# Altium PCB PCB.PcbDoc
Units mm, origin at the board's own origin, x right, y up, seen from the top; angles counter-clockwise.
Board outline 53.47 x 68.83 mm, 2 copper layers (Top Layer, Bottom Layer), stack 1.571 mm thick; 88 components, 55 nets, 289 pads, 36 vias.
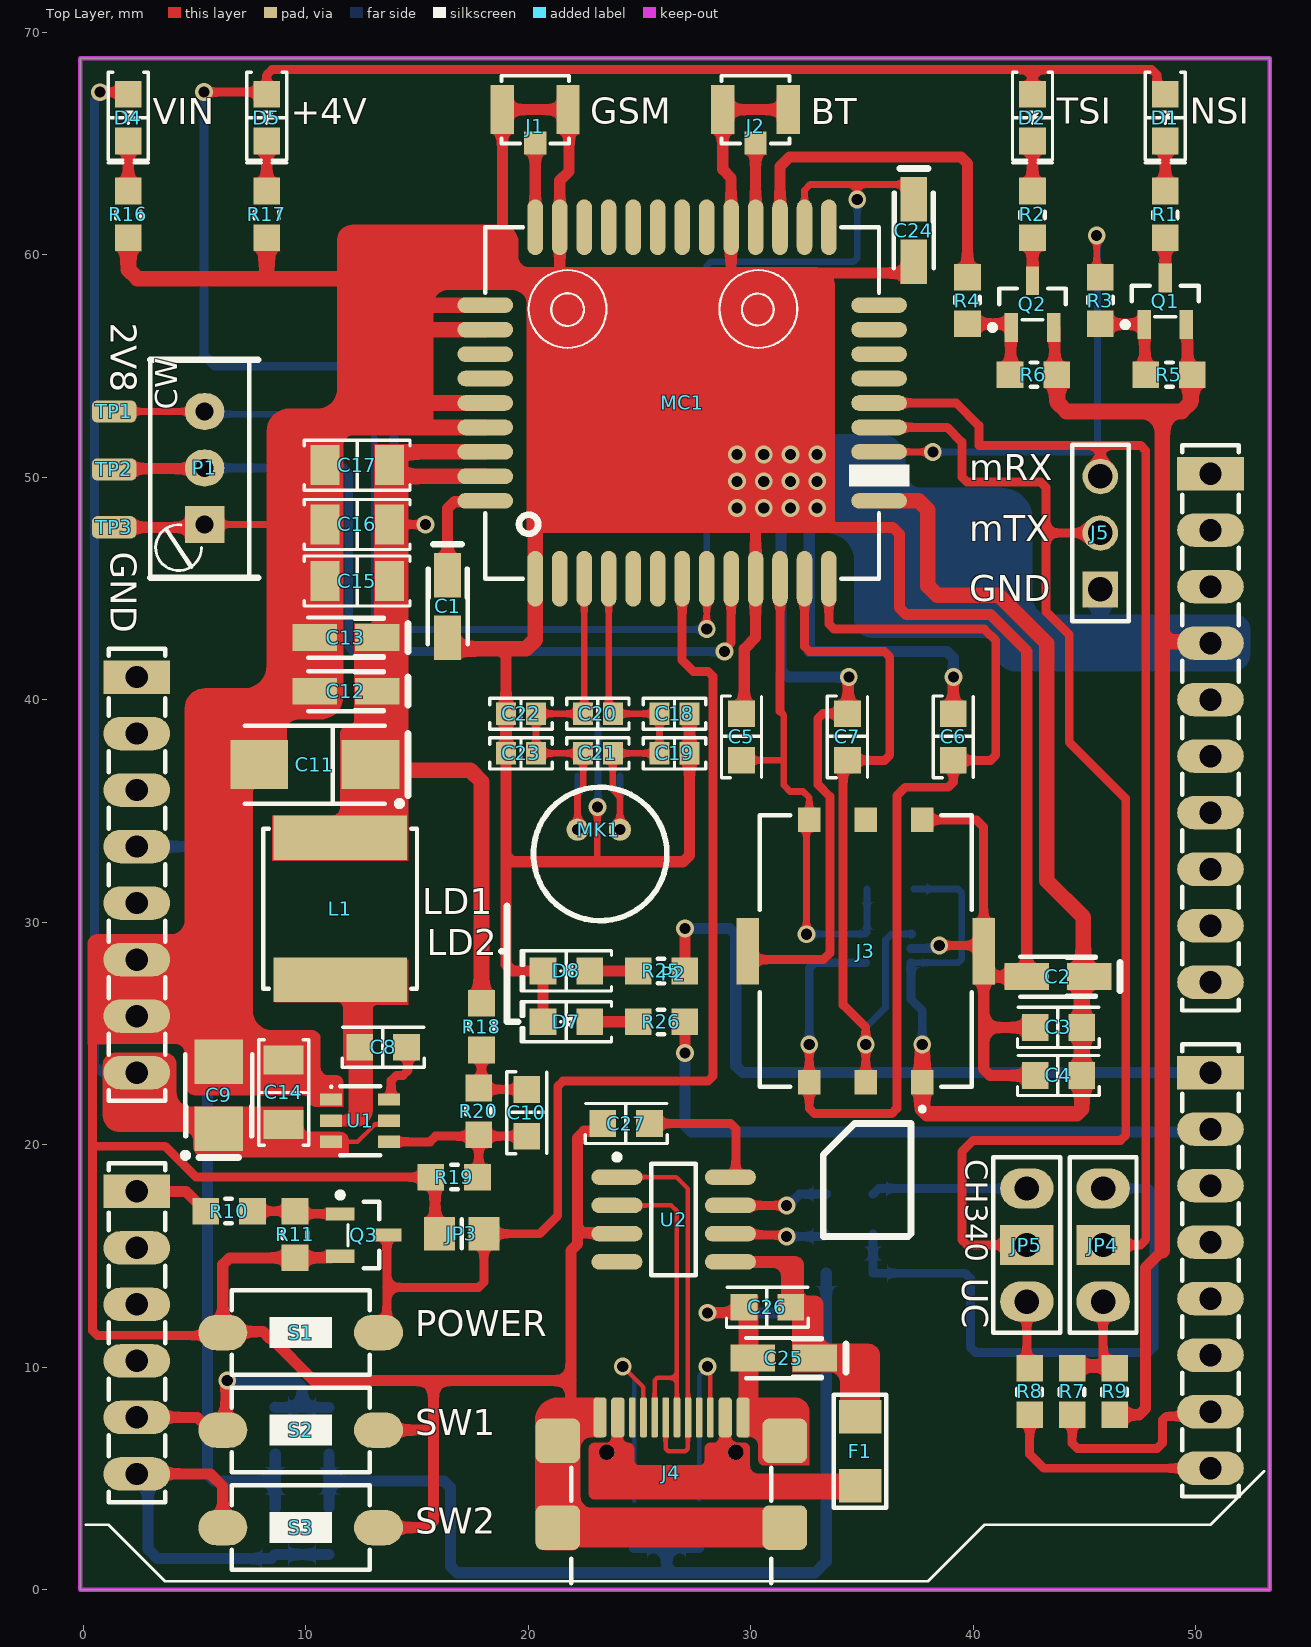
[diagram p0: Top Layer view]
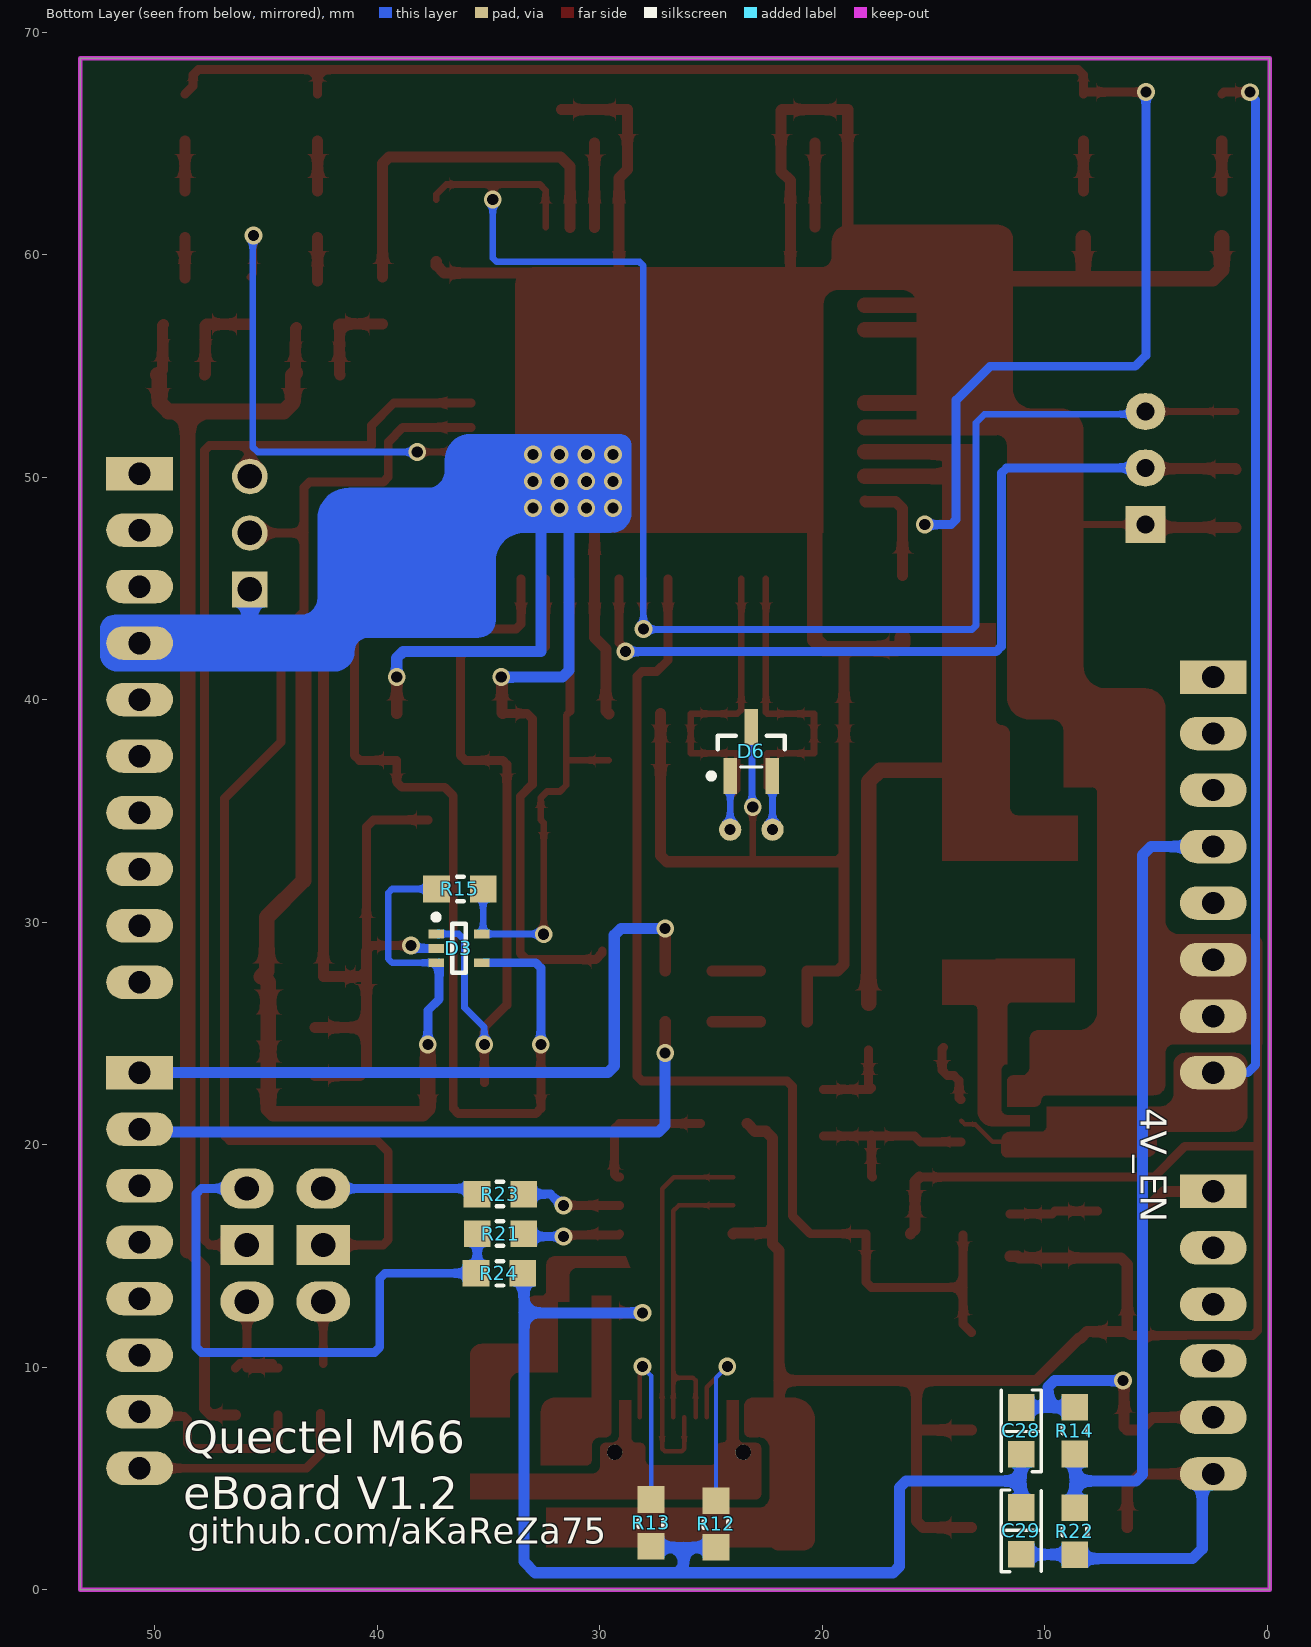
[diagram p1: Bottom Layer view, seen from below]

## Layer stack, top to bottom
Top Solder: solder mask 0.0102, Solder Resist, Dk 3.5
Top Layer: signal copper 0.0356
Dielectric 1: dielectric 1.5, FR-4, Dk 4.8
Bottom Layer: signal copper 0.0356
Bottom Solder: solder mask 0.0102, Solder Resist, Dk 3.5

## Board outline
-0.127,0 -0.127,68.834 53.34,68.834 53.34,0

## Design rules (kind name [scope] priority, off if disabled: settings)
AcuteAngle [All] p1: minimum=6.00000000000000E+0001 checktracksonly=TRUE
AssemblyTestPointUsage [All] p1 off:
AssemblyTestpoint [All] p1 off: testpointundercomponent=TRUE minsize=1.016 maxsize=2.54 preferedsize=1.524 minholesize=0 maxholesize=1.016 preferedholesize=0.813 testpointgrid=0.025 usegrid=TRUE gridtolerance=0 allowsidetop=TRUE allowsidebottom=TRUE
BoardOutlineClearance [All] p1: gap=0.2 ignorepadtopadclearanceinfootprint=FALSE
Clearance Poly_Clearance [All vs InPolygon] p1: gap=0.25 ignorepadtopadclearanceinfootprint=TRUE except(0.3: Arc-Hole Track-Hole SMDPad-Hole THPad-Hole Via-Hole Fill-Hole Poly-Hole Region-Hole Text-Hole)
Clearance [All] p2: gap=0.2 ignorepadtopadclearanceinfootprint=FALSE except(0.3: Arc-Hole Track-Hole SMDPad-Hole THPad-Hole Via-Hole Fill-Hole Poly-Hole Region-Hole Text-Hole)
FabricationTestPointUsage [All] p1 off: valid=0 allowmultiple=FALSE
FabricationTestpoint [All] p1 off: side=3 testpointundercomponent=TRUE minsize=1.016 maxsize=2.54 preferedsize=1.524 minholesize=0 maxholesize=1.016 preferedholesize=0.813 testpointgrid=0.025 allowsidetop=TRUE allowsidebottom=TRUE usegrid=TRUE gridtolerance=0
HoleSize [All] p1: absolutevalues=TRUE maxlimit=10 minlimit=0.4 maxpercent=80.000 minpercent=20.000
HoleToHoleClearance [All] p1: gap=0.3 allowstackedmicrovias=TRUE
MinimumAnnularRing [All] p1: minimumring=0.15
MinimumSolderMaskSliver [All] p1: minsoldermaskwidth=0.01
PolygonConnect [All] p1: thpad.connectstyle=Relief thpad.reliefconductorwidth=0.4 thpad.reliefentries=4 thpad.polygonreliefangle="90 Angle" thpad.airgapwidth=0.4 smdpad.connectstyle=Relief smdpad.reliefconductorwidth=0.4 smdpad.reliefentries=4 smdpad.polygonreliefangle="90 Angle" smdpad.airgapwidth=0.4 via.connectstyle=Direct via.reliefconductorwidth=0.254 via.reliefentries=4 via.polygonreliefangle="90 Angle" via.airgapwidth=0.254
RoutingVias [All] p1: holewidth=0.4 width=0.7 viastyle="Through Hole" minholewidth=0.4 minwidth=0.7 maxholewidth=3 maxwidth=6
SilkToSilkClearance [All] p1: silktosilkclearance=0
SilkToSolderMaskClearance [IsPad] p1: minsilkscreentomaskgap=0.01 clearancetoexposedcopper=TRUE
SolderMaskExpansion [All] p1: expansion=0.102 istentingtop=FALSE
Width [All] p1: maxlimit=10 minlimit=0.2 preferedwidth=0.3
21 further rules are at their usual default settings.

## Classes and differential pairs
component class Main: JP4 JP5
component class U_USBtoTTL: C25 C26 C27 F1 J4 R12 R13 R21 R23 R24 U2
component class U_Power: C8 C9 C10 C11 C12 C13 C14 C15 C16 C17 C28 C29 D4 D5 D7 D8 L1 P2 R7 R8 R9 R14 R16 R17 R18 R19 R20 R22 R25 R26 S2 S3 U1

## Components (designator, comment, footprint, x,y, rotation, side; value= is the part's Value field where it differs from the comment)
C1 "10u" SMT_C_Tantalum_A 16.383,44.196 r270 top
C2 "1u" SMT_C_Tantalum_A 43.815,27.559 r180 top
C3 "100n" "CAP 0805/2012" 43.815,25.273 r180 top
C4 "33p" "CAP 0805/2012" 43.815,23.114 r180 top
C5 "33p" "CAP 0805/2012" 29.591,38.354 r90 top
C6 "33p" "CAP 0805/2012" 39.116,38.354 r90 top
C7 "33p" "CAP 0805/2012" 34.353,38.354 r90 top
C8 "100n" "CAP 0805/2012" 13.462,24.384 r180 top
C9 "10u" SMT_C_Tantalum_B 6.096,22.225 r90 top
C10 "68p" "CAP 0805/2012" 19.939,21.463 r90 top
C11 "100u" SMT_C_Tantalum_C 10.414,37.084 r180 top
C12 "10u" SMT_C_Tantalum_A 11.811,40.386 r180 top
C13 "1u" SMT_C_Tantalum_A 11.811,42.799 r180 top
C14 "100n" "CAP 1206/3216" 9.017,22.352 r90 top
C15 "100n" "CAP 1206/3216" 12.319,45.339 r180 top
C16 "33p" "CAP 1206/3216" 12.319,47.879 r180 top
C17 "10p" "CAP 1206/3216" 12.319,50.546 r180 top
C18 "10p" "CAP 0603/1608" 26.583,39.37 r180 top
C19 "33p" "CAP 0603/1608" 26.583,37.592 r180 top
C20 "10p" "CAP 0603/1608" 23.134,39.37 r180 top
C21 "33p" "CAP 0603/1608" 23.134,37.592 r180 top
C22 "10p" "CAP 0603/1608" 19.685,39.37 r180 top
C23 "33p" "CAP 0603/1608" 19.685,37.592 r180 top
C24 "4.7u" SMT_C_Tantalum_A 37.338,61.087 r270 top
C25 "DS1307" SMT_C_Tantalum_A 31.496,10.414 r180 top value=4.7u
C26 "DS1307" "CAP 0805/2012" 30.734,12.7 r180 top value=100n
C27 "10n" "CAP 0805/2012" 24.384,20.955 r180 top
C28 "100n" "CAP 0805/2012" 11.049,7.112 r270 bottom
C29 "100n" "CAP 0805/2012" 11.049,2.667 r90 bottom
D1 "Blue" "LED 0805/2012 BLUE" 48.641,66.167 r270 top
D2 "Blue" "LED 0805/2012 BLUE" 42.672,66.167 r270 top
D3 "SMF-05" SC70-5_N 36.322,28.829 r180 bottom
D4 "Yellow" "LED 0805/2012 YELLOW" 2.032,66.167 r270 top
D5 "Blue" "LED 0805/2012 BLUE" 8.255,66.167 r270 top
D6 "SM712" SOT23_M 23.18,37.676 r90 bottom
D7 "RED" "LED 0805/2012 RED" 21.717,25.527 r180 top
D8 "GREEN" "LED 0805/2012 GREEN" 21.717,27.813 r180 top
F1 "0.25A" 1206_F 34.925,6.223 r90 top
J1 "U.FL" IPEX-3x3mm 20.32,66.524 r270 top
J2 "U.FL" IPEX-3x3mm 30.226,66.524 r270 top
J3 "6'Pin" GCT_SIM8051_Plastik 35.179,28.702 r0 top
J4 "16b" "USBC_SMD_16_USB4110 - Extended" 26.233,6.938 r180 top
J5 "3" HDR_THT_3M_2.54mm 45.72,47.498 r90 top
JP3 "Jumper" "RESC2012M (0805)" 17.018,16.002 r0 top
JP4 "0b" "jumper selector" 45.847,12.954 r90 top
JP5 "0b" "jumper selector" 42.418,12.954 r90 top
L1 "10u" L_7 11.557,30.607 r90 top
MC1 "M66" m66 26.924,53.34 r90 top
MK1 "Mic" mic6 24.765,33.071 r180 top
P1 "10K" "Multi turn 01" 5.461,47.879 r180 top
P2 "UNO" Arduino_uno_S_3 26.162,32.385 r0 top locked
Q1 "NPN" SOT23_N 48.641,57.912 r90 top
Q2 "NPN" SOT23_N 42.672,57.785 r90 top
Q3 "NPN" SOT23_N 12.607,15.941 r0 top
R1 "100b" "RES 0805 (2012X06L)" 48.641,60.965 r90 top
R2 "100b" "RES 0805 (2012X06L)" 42.672,60.965 r90 top
R3 "4.7K" "RES 0805 (2012X06L)" 45.72,58.796 r270 top
R4 "4.7K" "RES 0805 (2012X06L)" 39.751,58.796 r270 top
R5 "47K" "RES 0805 (2012X06L)" 49.657,54.61 r180 top
R6 "47K" "RES 0805 (2012X06L)" 43.561,54.61 r180 top
R7 "1K" "RES 0805 (2012X06L)" 44.456,8.06 r90 top
R8 "1K" "RES 0805 (2012X06L)" 42.545,8.06 r90 top
R9 "5.6K" "RES 0805 (2012X06L)" 46.367,8.06 r90 top
R10 "4.7K" "RES 0805 (2012X06L)" 5.715,17.018 r0 top
R11 "47K" "RES 0805 (2012X06L)" 9.525,15.118 r90 top
R12 "4.7K" "RES 0805 (2012X06L)" 24.765,2.105 r90 bottom
R13 "4.7K" "RES 0805 (2012X06L)" 27.686,2.159 r90 bottom
R14 "10K" "RES 0805 (2012X06L)" 8.636,8.001 r270 bottom
R15 "15k" "RES 0805 (2012X06L)" 35.433,31.496 r0 bottom
R16 "1.8K" "RES 0805 (2012X06L)" 2.032,60.965 r90 top
R17 "100b" "RES 0805 (2012X06L)" 8.255,60.965 r90 top
R18 "49.9b" "RES 0805 (2012X06L)" 17.907,26.157 r270 top
R19 "17.8K" "RES 0805 (2012X06L)" 17.526,18.542 r180 top
R20 "100K" "RES 0805 (2012X06L)" 17.78,22.347 r270 top
R21 "560b" "RES 0805 (2012X06L)" 35.301,16.002 r180 bottom
R22 "10K" "RES 0805 (2012X06L)" 8.636,1.778 r90 bottom
R23 "560b" "RES 0805 (2012X06L)" 35.306,17.78 r180 bottom
R24 "1K" "RES 0805 (2012X06L)" 33.655,14.224 r0 bottom
R25 "560b" "RES 0805 (2012X06L)" 25.146,27.813 r0 top
R26 "560b" "RES 0805 (2012X06L)" 25.146,25.527 r0 top
S1 "PB" SW_PB_SMD_2PIN_SPST_6X3X2 9.779,11.557 r0 top
S2 "PB" SW_PB_SMD_2PIN_SPST_6X3X2 9.779,7.175 r0 top
S3 "PB" SW_PB_SMD_2PIN_SPST_6X3X2 9.779,2.794 r0 top
TP1 "TestPoint" TP_SMD_1x2 1.346,52.984 r90 top
TP2 "TestPoint" TP_SMD_1x2 1.346,50.381 r90 top
TP3 "TestPoint" TP_SMD_1x2 1.346,47.777 r90 top
U1 "TPS54302" TPS54302 12.446,21.082 r270 top
U2 "CH340N" SO8_narrow_m 26.543,16.637 r0 top

## Footprints (in the part's own frame and the unit in brackets; to place one, negate y for a bottom-side part, rotate by r counter-clockwise, add the part's x,y. Pads: shape width x height; smd on the part's side, far side on the other; paste and mask are expansions set on the pad)
1206_F [mm] "Surface mount FUSE 1206"
  rect 1.5x1.9 smd: 1(-1.55,0) 2(1.55,0)
  silkscreen extent -2.54,-1.18 2.54,1.18, body extent -1.6,-0.83 1.6,0.83, height 0.56
Arduino_uno_S_3 [mm]
  rect 3x1.5 hole 1: 1(-23.749,8.636) 9(-23.749,-14.478) 22(24.511,-9.144) 32(24.511,17.78)
  oval 3x1.5 hole 1: 2(-23.749,6.096) 3(-23.749,3.556) 4(-23.749,1.016) 5(-23.749,-1.524) 6(-23.749,-4.064) 7(-23.749,-6.604) 8(-23.749,-9.144) 10(-23.749,-17.018) 11(-23.749,-19.558) 12(-23.749,-22.098) 13(-23.749,-24.638) 14(-23.749,-27.178) 15(24.511,-26.924) 16(24.511,-24.384) 17(24.511,-21.844) 18(24.511,-19.304) 19(24.511,-16.764) 20(24.511,-14.224) 21(24.511,-11.684) 23(24.511,-5.08) 24(24.511,-2.54) 25(24.511,0) 26(24.511,2.54) 27(24.511,5.08) 28(24.511,7.62) 29(24.511,10.16) 30(24.511,12.7) 31(24.511,15.24)
  silkscreen extent -26.03,-32 26.91,19.05, body extent -25.02,-28.31 25.78,19.05, height 8.51
"CAP 0603/1608" [mm] "Chip Capacitor, 2-Leads, Body 1.60x0.80mm, IPC Medium Density"
  rect 0.9x1 smd: 1(-0.675,0) 2(0.675,0)
  silkscreen extent -1.4,-0.7 1.4,0.7, body extent -0.8,-0.41 0.8,0.41, height 0.82
"CAP 0805/2012" [mm] "Chip Capacitor, 2-Leads, Body 2.00x1.20mm, IPC Medium Density"
  rect 1.2x1.2 smd: 1(-1.075,0) 2(1.025,0)
  silkscreen extent -1.86,-0.9 1.82,0.9, body extent -1,-0.64 1,0.64, height 1.26
"CAP 1206/3216" [mm] "Chip Capacitor, 2-Leads, Body 3.25x1.60mm, IPC Medium Density"
  rect 1.3x1.8 smd: 1(-1.45,0) 2(1.45,0)
  silkscreen extent -2.37,-1.12 2.37,1.12, body extent -1.6,-0.81 1.6,0.81, height 1.62
GCT_SIM8051_Plastik [mm]
  rect 1x1.1 smd: 1(2.54,-5.9) 2(0,-5.9) 3(-2.54,-5.9) 4(-2.54,5.9) 5(2.54,5.9) 6(0,5.9)
  rect 1x3 smd: 5(-5.3,0) 5(5.3,0)
  silkscreen extent -4.77,-7.2 4.77,6.1, body extent -5.4,-6.1 5.4,6.1, height 1.35
HDR_THT_3M_2.54mm [mm] "Pin Header, pitch 2.54 mm, THT, Vertical, single row, 3p"
  rect 1.6x1.6 hole 1.1: 1(-2.54,0)
  round 1.6 hole 1.1: 2(0,0) 3(2.54,0)
  silkscreen extent -3.96,-1.27 3.96,1.27, body extent -3.81,-1.27 3.81,1.27, height 8.57
IPEX-3x3mm [mm] "U.FL-R-SMT"
  rect 1.05x1 smd: 1(1.5,0)
  rect 2.2x1.05 smd mask+0.102: 2(0,-1.475)
  rect 2.2x1.05 smd: 3(0,1.475)
  silkscreen extent -1.52,-1.52 1.52,1.52, body extent -1.55,-1.5 1.55,1.5, height 1.25
"jumper selector" [mm]
  oval 1.8x2.4 hole 1.1: 1(0,0) 3(5.08,0)
  rect 1.8x2.4 hole 1.1: 2(2.54,0)
  silkscreen extent -1.4,-1.5 6.48,1.5, body extent -1.24,-1.27 6.38,1.27, height 10.16
L_7 [mm] "INDUCTOR, 7.2X6.9mm, 7.1X6.5mm, SPM6530"
  rect 2x6 smd: 1(-3.2,0) 2(3.2,0)
  silkscreen extent -3.6,-3.45 3.6,3.45, body extent -3.62,-3.35 3.63,3.35, height 3
"LED 0805/2012 BLUE" [mm] "Chip Diode, 2-Leads, Body 2.00x1.25mm, IPC Medium Density"
  rect 1.2x1.2 smd: 1(-1.05,0) 2(1.05,0)
  silkscreen extent -2.03,-0.9 2.03,0.9, body extent -1,-0.62 1,0.63, height 0.9
"LED 0805/2012 GREEN" [mm] "Chip Diode, 2-Leads, Body 2.00x1.25mm, IPC Medium Density"
  rect 1.2x1.2 smd: 1(-1.05,0) 2(1.05,0)
  silkscreen extent -2.03,-0.9 2.03,0.9, body extent -1,-0.62 1,0.63, height 0.9
"LED 0805/2012 RED" [mm] "Chip Diode, 2-Leads, Body 2.00x1.25mm, IPC Medium Density"
  rect 1.2x1.2 smd: 1(-1.05,0) 2(1.05,0)
  silkscreen extent -2.03,-0.9 2.03,0.9, body extent -1,-0.62 1,0.63, height 0.9
"LED 0805/2012 YELLOW" [mm] "Chip Diode, 2-Leads, Body 2.00x1.25mm, IPC Medium Density"
  rect 1.2x1.2 smd: 1(-1.05,0) 2(1.05,0)
  silkscreen extent -2.03,-0.9 2.03,0.9, body extent -1,-0.62 1,0.63, height 0.9
m66 [mm]
  oval 2.5x0.7 smd: 1(-7.9,6.6) 2(-7.9,5.5) 3(-7.9,4.4) 4(-7.9,3.3) 5(-7.9,2.2) 6(-7.9,1.1) 7(-7.9,0) 8(-7.9,-1.1) 9(-7.9,-2.2) 10(-7.9,-3.3) 11(-7.9,-4.4) 12(-7.9,-5.5) 13(-7.9,-6.6) 23(7.9,-6.6) 24(7.9,-5.5) 25(7.9,-4.4) 26(7.9,-3.3) 27(7.9,-2.2) 28(7.9,-1.1) 29(7.9,0) 30(7.9,1.1) 31(7.9,2.2) 32(7.9,3.3) 33(7.9,4.4) 34(7.9,5.5) 35(7.9,6.6)
  oval 0.7x2.5 smd: 14(-4.4,-8.85) 16(-2.2,-8.85) 17(-1.1,-8.85) 18(0,-8.85) 19(1.1,-8.85) 20(2.2,-8.85) 21(3.3,-8.85) 22(4.4,-8.85) 36(4.4,8.85) 37(3.3,8.85) 38(2.2,8.85) 39(1.1,8.85) 40(0,8.85) 41(-1.1,8.85) 42(-2.2,8.85) 43(-3.3,8.85) 44(-4.4,8.85)
  silkscreen extent -7.9,-10.21 7.9,8.85, body extent -7.89,-8.83 7.91,8.87, height 2.5
mic6 [mm]
  round 1 hole 0.5: 1(0.635,-1.092) 2(2.54,-1.092)
  silkscreen extent -1.48,-3 4.52,3, body extent -1.43,-3.02 4.57,2.98, height 2.26
"Multi turn 01" [mil] "Stand Multi Turn - Turning CW Increase P1~2 Resistor"
  rect 70x65 hole 31.5: 1(0,0)
  oval 70x65 hole 31.5: 2(0,-100) 3(0,-200)
  silkscreen extent -94,-291 96,94, body extent -74,-282 92,92, height 452
"RES 0805 (2012X06L)" [mm] "Chip Resistor, 2-Leads, Body 2.0x1.3mm, IPC High Density _ (0.100 W)"
  rect 1.2x1.2 smd: 1(-0.2,0) 2(1.9,0)
  silkscreen extent 0.67,-0.55 0.98,0.55, body extent -0.19,-0.63 1.84,0.64, height 0.6
"RESC2012M (0805)" [mm] "Chip Resistor, Body 2.0x1.3mm, IPC Low Density"
  rect 1.4x1.5 smd: 1(-1,0) 2(1,0)
  silkscreen extent 0,-0.65 0,0.65, body extent -1.02,-0.63 1.02,0.63, height 0.6
SC70-5_N [mm]
  rect 0.7x0.4 smd: 1(-1.025,0.65) 2(-1.025,0) 3(-1.025,-0.65) 4(1.025,-0.65) 5(1.025,0.65)
  silkscreen extent -1.15,-1.1 0.3,1.52, body extent -1.1,-1 1.1,1, height 0.93
SMT_C_Tantalum_A [mm] "Capacitor, SM Tantalum; Body 3.2 x 1.6 mm (LxW typ)"
  rect 2x1.2 smd: 1(-1.4,0) 2(1.4,0)
  silkscreen extent -2.79,-0.9 1.7,0.9, body extent -1.6,-0.8 1.6,0.8, height 1.6
SMT_C_Tantalum_B [mm] "Capacitor, SM Tantalum; Body 3.5 x 2.8 mm (LxW typ)"
  rect 2x2.2 smd: 1(-1.5,0) 2(1.5,0)
  silkscreen extent -2.82,-1.5 1.85,1.62, body extent -1.75,-1.4 1.75,1.4, height 1.9
SMT_C_Tantalum_C [mm] "Capacitor, SM Tantalum; Body 6.0 x 3.2 mm (LxW typ)"
  rect 2.6x2.2 smd: 1(-2.5,0) 2(2.5,0)
  silkscreen extent -4.19,-1.75 3.15,1.87, body extent -3.15,-1.75 3.15,1.75, height 2.8
SO8_narrow_m [mm] "8-Pin Small Outline Package (SO8), IPC Low Density"
  oval 2.3x0.7 smd: 1(-2.55,1.905) 2(-2.55,0.635) 3(-2.55,-0.635) 4(-2.55,-1.905) 5(2.55,-1.905) 6(2.55,-0.635) 7(2.55,0.635) 8(2.55,1.905)
  silkscreen extent -2.67,-2.5 1,2.93, body extent -3.12,-2.39 3.07,2.44, height 1.7
SOT23_M [mm] "SOT23, 3-Leads, Body 2.9x1.3mm, Pitch 0.95mm, Lead Span 2.3mm, IPC Low Density"
  rect 1.6x0.6 smd: 1(-1.1,0.95) 2(-1.1,-0.95) 3(1.1,0)
  silkscreen extent -1.22,-1.5 0.7,1.93, body extent -1.27,-1.5 1.27,1.5, height 1.1
SOT23_N [mm] "SOT23, 3-Leads, Body 2.9x1.3mm, Pitch 0.95mm, Lead Span 2.3mm, IPC Medium Density"
  rect 1.3x0.6 smd: 1(-1.05,0.95) 2(-1.05,-0.95) 3(1.05,0)
  silkscreen extent -1.17,-1.5 0.7,1.92, body extent -1.27,-1.5 1.27,1.5, height 1.1
SW_PB_SMD_2PIN_SPST_6X3X2 [mm] "SWITCH, PUSHBUTTON, SMD, SPST, 6X3.5X2.5mm, RS-282G05A3, SKQYPA, 50000 Cycles"
  oval 2.2x1.6 smd mask+0.1: 1(-3.5,0) 2(3.5,0)
  silkscreen extent -3.1,-1.9 3.1,1.9, body extent -3.4,-1.86 3.4,1.86, height 2.5
TP_SMD_1x2 [mm]
  rrect50% 1x2 smd: 1(-0.025,-0.051)
TPS54302 [mm] "SOT-457/SC-74; 6 Leads; Body 3 x 3 mm, inc. leads (LxW max)"
  rect 0.55x1 smd: 1(-0.95,-1.3) 2(0,-1.3) 3(0.95,-1.3) 4(0.95,1.3) 5(0,1.3) 6(-0.95,1.3)
  silkscreen extent -1.57,-1.35 1.55,0.9, body extent -1.45,-1.4 1.45,1.4, height 1.45
"USBC_SMD_16_USB4110 - Extended" [mm] "CONN, USB, Type C, USB4110"
  rrect50% 0.6x1.8 smd mask+0.075: A1B12(2.997,-0.805) A4B9(2.197,-0.805) B1A12(-3.428,-0.805) B4A9(-2.628,-0.805)
  rrect50% 0.3x1.8 smd mask+0.075: A5(1.043,-0.805) A6(0.041,-0.805) A7(-0.46,-0.805) A8(-1.461,-0.805) B5(-1.962,-0.805) B6(-0.961,-0.805) B7(0.542,-0.805) B8(1.544,-0.805)
  rrect30% 2x2 smd: S1(4.897,0.244) S2(-5.303,0.244) S3(4.897,4.144) S4(-5.303,4.144)
  round 0.7 hole 0.7 unplated: ""(-3.093,0.764) ""(2.687,0.764)
  silkscreen extent -4.7,1.45 4.3,6.64, body extent -5.85,-0.64 5.45,7.04, height 3.23

## Part data
C1 C2 C24: library part Cap_Tantalum, "Tantalum Capacitor,TAJ Series-SMD", Package=Package?, Rating=6.3V, Inflow=inflow?, Type=Tantalum, Validation=Valid
C3 C8 C26 C27 C28 C29: library part Cap_Multi_SMD_100nF_0805, "Bipolar ceramic capacitor SMD", Package=0805, Rating=50V, Inflow=inflow?, Type=MultiLayer
  C3 C8 C28 C29: Validation=Valid
C4 C5 C6 C7 C10: library part Cap_Multi_SMD_0805, "Bipolar ceramic capacitor SMD", Package=0805, Rating=Rating?, Inflow=inflow?, Type=MultiLayer, Validation=Valid
C9: library part Cap_Tantalum, "Tantalum Capacitor,TAJ Series-SMD", Package=Package?, Rating=25v, Inflow=inflow?, Type=Tantalum, Validation=Valid
C11: library part Cap_Tantalum, "Tantalum Capacitor,TAJ Series-SMD", Package=SMD-C, Rating=6.3V, Inflow=inflow?, Type=Tantalum
C12: library part Cap_Tantalum, "Tantalum Capacitor,TAJ Series-SMD", Package=Package?, Rating=6.3v, Inflow=inflow?, Type=Tantalum, Validation=Valid
C13 C25: library part Cap_Tantalum, "Tantalum Capacitor,TAJ Series-SMD", Package=SMD-A, Rating=6.3V, Inflow=inflow?, Type=Tantalum
C14 C15: library part Cap_Multi_SMD_100nF_1206, "Bipolar ceramic capacitor SMD", Package=1206, Rating=50V, Inflow=inflow?, Type=MultiLayer
  C14: Validation=Valid
C16 C17: library part Cap_Multi_SMD_1206, "Bipolar ceramic capacitor SMD", Package=1206, Rating=50V, Inflow=inflow?, Type=MultiLayer
C18 C19 C20 C21 C22 C23: library part Cap_Multi_SMD, "Bipolar ceramic capacitor SMD", Package=Package?, Rating=Rating?, Inflow=inflow?, Type=Type?, Validation=Valid
D1 D2 D4 D5 D7 D8: library part Semi_LED_SMD, "LED", Package=Package?, Rating=Rating?, Inflow=inflow?, Type=LED, Validation=Valid
D3: library part Semi_Diod_TVS_SMF05, "TVS Diode Array", Package=SC70-5, Rating=Rating?, Inflow=inflow?, Type=TVS, Validation=Valid
D6: library part Semi_Diod_TVS_SM712, "TVS, ESD PROTECT, 2CH, 400W/17A PP, 7.5VBR, ±8KV ESDmin", Package=Package?, Rating=Rating?, Inflow=inflow?, Type=Type?, Validation=Valid
F1: library part Other_Elec_Fuse_SMD, "Short circiut  protection", Package=1206, Rating=Rating?, Inflow=0.5A, Type=Fast
J1 J2: library part Con_RF_U.FL, Package=SMD, Rating=Rating?, Inflow=inflow?, Type=RF, Validation=NT
J3: library part Con_Socket_SimCard_1, "Nano SimCard Holder 6P", Package=SMD, Rating=Rating?, Inflow=inflow?, Type=Nano, Validation=Valid
J4: library part Con_USB_C_16P, "USB C Female Connector", Package=SMD, Rating=Rating?, Inflow=inflow?, Type=C, Validation=NT
J5: library part Con_MPH_3x1_V_THT_2.54, "Header, single row, 3 pin", Package=Package?, Rating=Rating?, Inflow=7152, Type=Type?, Validation=NT
JP3: library part Other_Elec_Jumper_0805, "Jumper Component", Package=0805, Rating=Rating?, Inflow=inflow?, Type=Type?, Validation=Valid
JP4 JP5: library part SW_Other_JSelector_THT, "Jumper Selector", Package=Dip, Rating=Rating?, Inflow=5145, Type=Selector, Validation=Valid
L1: library part Ind_SMD, "Inductor", Package=Package?, Rating=3.8A, Inflow=inflow?, Type=Type?, Validation=Valid
MC1: library part ModSen_Com_M66, "Quectel GSM/GPRS Module", Package=Dip, Rating=Rating?, Inflow=inflow?, Type=GSM-GPRS, Validation=Valid
MK1: library part Other_Elec_Microphone, "Microphone", Package=Package?, Rating=Rating?, Inflow=2206, Type=Type?, Validation=NT
P1: library part Res_Multi, "Multi Turn", Package=Package?, Rating=Rating?, Inflow=inflow?, Type=Type?, Validation=Valid
P2: library part Con_Arduino_UNO_S, "Arduino uno slave", Package=Package?, Rating=Rating?, Inflow=inflow?, Type=Type?, Validation=Valid
Q1 Q2 Q3: library part Semi_BJT_BC817, "NPN General purpose Transistor", Package=Package?, Rating=Rating?, Inflow=inflow?, Type=Type?, Validation=Valid
R1 R2 R3 R4 R5 R6 R7 R8 R9 R10 R11 R12 R13 R14 R15 R16 R17 R18 R19 R20 R21 R22 R23 R24 R25 R26: library part Res_SMD_0805, "Resistor", Package=0805, Rating=0.125W, Inflow=inflow?
  R1 R2 R3 R4 R5 R6 R7 R8 R9 R10 R11 R14 R15 R16 R17 R22 R25 R26: Type=10%, Validation=Valid
  R12 R13 R21 R23 R24: Type=10%
  R18 R19 R20: Type=1%, Validation=Valid
S1 S2 S3: library part SW_PushButton_2_SMD, "SMT Tactile ‎Switch", Package=SMD, Rating=2b, Inflow=8260, Type=Vertical, Validation=Valid
TP1 TP2 TP3: library part Other_Elec_TP_SMD, "Test Point", Package=Package?, Rating=Rating?, Inflow=inflow?, Type=Type?, Validation=NT
U1: library part IC_Reg_TPS54302, "3'A Synchronous Step-Down Converter", Package=SOT-23-6, Rating=S, Inflow=inflow?, Type=Switching, Validation=Valid
U2: library part IC_Converter_CH340N, "TTL To USB Chip", Package=SO-8, Rating=Rating?, Inflow=inflow?, Type="USB to TTL"

## Via types
v1: diameter 0.8, hole 0.5, Top Layer to Bottom Layer, tented both sides, 36 vias

## Nets (pads, with @x,y where several pads share a name; then routed paths per layer and width w, separated by ;. In a path a pad name is that pad's centre, name@x,y a point inside that pad or via, vN(x,y) a via of type N, cw(c..) or ccw(c..) an arc to the next point about the centre after c; other vN are vias at no path point)
2V8: C24.1 MC1.8 MC1.24 P1.3 TP1.1 | length 71.9
  Top Layer w0.3: TP1.1 P1.3 ; v1@28.024,43.19 v1(28.029,43.185) 28.029,45.44 MC1.8 ; MC1.24 32.424,62.904 32.678,63.158 34.783,63.158 ; v1(34.798,62.484) 34.783,62.499 34.783,63.158 ; C24.1 37.338,62.708 36.888,63.158 34.783,63.158
  Bottom Layer w0.3: P1.3 5.588,52.832 12.7,52.832 13.081,52.451 13.081,43.335 13.257,43.159 28.003,43.159 v1(28.029,43.185) 28.029,59.508 28.205,59.684 34.622,59.684 34.798,59.86 v1(34.798,62.484)
+3.3: P2.4 R14.2 R22.2 | length 36.8
  Bottom Layer w0.5: P2.4 5.207,33.401 5.588,33.02 5.588,5.182 5.881,4.889 8.636,4.889 ; R22.2 8.636,4.889 ; R14.2 8.636,4.889
+4: C11.1 C12.1 C13.1 C15.1 C16.1 C17.1 D1.1 D2.1 D5.1 L1.2 MC1.42 MC1.43 R18.1 | length 99.3
  Top Layer w0.4: v1(5.439,67.313) 8.159,67.313 D5.1 8.255,68.092 8.489,68.326 42.672,68.326 ; C16.1 15.379,47.879 v1(15.385,47.873) ; D2.1 42.672,68.326 ; D1.1 48.267,67.591 48.267,68.092 48.033,68.326 42.672,68.326
  Top Layer w0.7: 14.224,36.83 17.399,36.83 17.907,36.322 R18.1 ; MC1.43 13.769,50.04 C17.1 13.769,51.14 MC1.42
  Bottom Layer w0.4: v1(5.439,67.313) 5.439,55.477 5.924,54.991 12.446,54.991 13.97,53.467 13.97,48.107 14.204,47.873 v1(15.385,47.873)
cRX: JP5.3 R23.1 | length 7
  Bottom Layer w0.4: R23.1 35.76,18.034 JP5.3
cTX: JP4.3 R21.1 R24.2 | length 27.1
  Bottom Layer w0.4: R21.1 35.501,14.224 39.644,14.224 39.878,13.99 39.878,10.902 40.112,10.668 47.899,10.668 48.133,10.902 48.133,17.8 47.899,18.034 JP4.3
GND: C1.2 C2.2 C3.2 C4.2 C5.2 C6.2 C7.2 C9.2 C11.2 C12.2 C13.2 C14.2 C15.2 C16.2 C17.2 C18.1 C19.1 C22.2 C23.2 C24.2 C25.2 C26.2 C27.2 C28.2 C29.2 D3.2 D6.3 D7.2 D8.2 J1.2 J1.3 J2.2 J2.3 J3.5 J4.A1B12 J4.B1A12 J4.S1 J4.S2 J4.S3 J4.S4 J5.1 JP3.1 MC1.1 MC1.10 MC1.27 MC1.34 MC1.36 MC1.37 MC1.40 MC1.41 P1.1 P2.6 P2.7 P2.29 Q1.2 Q2.2 Q3.2 R5.1 R6.1 R9.1 R11.1 R12.1 R13.1 R16.1 R17.1 R19.2 R24.1 S1.1 S2.2 S3.2 TP3.1 U1.1 U2.3 | length 438.8
  Top Layer w0.3: P1.1 C16.2 ; v1(23.114,35.179) 23.114,32.738 23.134,32.718
  Top Layer w0.4: 0.418,24.536 0.418,11.657 0.653,11.423 1.173,11.423 1.187,11.437 3.639,11.437 3.653,11.423 6.145,11.423 S1.1 ; 0.653,19.932 3.69,19.932 5.08,18.542 R19.2 ; P2.7@1.663,25.781 P2.7 ; J3.5@29.879,28.702 29.879,28.621 30.179,28.321 33.274,28.321 33.563,28.61 33.563,35.652 33.02,36.195 33.02,39.144 33.254,39.379 C7.2 ; J3.5@37.719,34.602 40.152,34.602 40.479,34.275 40.479,28.702 40.225,28.956 v1(38.481,28.956)
  Top Layer w0.5: TP3.1 5.334,47.752 P1.1 ; S1.1 6.279,14.625 6.572,14.918 R11.1 11.134,14.918 11.207,14.991 Q3.2 ; S1.1@6.489,11.601 8.081,11.601 8.379,11.303 8.459,11.303 10.364,9.398 15.748,9.398 ; S3.2 15.455,2.794 15.748,3.087 15.748,7.239 ; S2.2 15.684,7.175 15.748,7.239 ; R19.2 15.822,18.346 15.822,16.198 JP3.1 ; 18.717,42.291 19.01,41.998 C22.2 C23.2 19.01,33.011 ; 18.845,59.104 J1.2 J1.3 21.844,66.475 21.844,63.754 21.424,63.334 21.424,58.801 21.209,58.801 ; D7.2 D8.2 19.303,27.813 19.01,28.106 19.01,33.011 ; 20.955,4.953 J4.S1@20.955,6.694 ; J4.S1 21.932,7.29 21.932,9.398 ; C27.2 23.009,20.605 22.518,20.605 22.225,20.312 22.225,16.295 ; U2.3 23.955,16.04 22.48,16.04 22.225,16.295 ; C18.1@27.262,39.374 C18.1 C19.1 27.258,33.011 26.965,32.718 23.134,32.718 19.303,32.718 19.01,33.011 ; v1(28.067,12.446) 29.709,12.446 C26.2 ; 29.21,58.928 29.124,58.928 MC1.27 29.124,63.459 28.751,63.832 J2.2 J2.3 ; C5.2@29.587,39.374 C5.2 29.718,39.506 29.718,42.291 30.224,42.797 30.224,48.514 29.972,48.514 ; 33.02,59.182 36.988,59.182 37.338,59.532 C24.2 ; 33.782,47.752 36.41,47.752 36.703,47.459 36.703,44.123 36.996,43.83 40.782,43.83 42.415,42.197 C2.2 40.729,27.559 J3.5@40.479,27.809 ; C7.2 34.385,39.41 v1@34.385,40.989 ; v1@34.385,41.139 v1@34.417,41.171 ; C6.2 v1(39.116,41.021) ; J3.5@40.479,28.702 J3.5@40.479,27.809 ; C4.2 40.772,23.114 40.479,23.407 40.479,25.273 ; C3.2 40.479,25.273 ; Q2.2 43.672,56.685 R6.1@43.672,54.699 ; R9.1 47.459,7.86 47.752,8.153 47.752,14.478 48.514,15.24 ; 48.514,42.951 48.514,43.18 ; Q1.2 49.641,56.812 49.641,54.826 R5.1 ; 15.748,7.239 15.748,9.398 ; 15.748,9.398 21.932,9.398 ; 21.932,9.398 21.932,15.24 22.225,15.533 22.225,16.295 ; 40.479,25.273 J3.5@40.479,27.809
  Top Layer w0.7: R16.1 2.032,59.338 2.442,58.928 8.128,58.928 ; R17.1 8.255,59.055 8.128,58.928 ; 11.938,58.928 8.128,58.928 ; 14.097,57.531 14.097,57.74 MC1.36 ; 14.224,56.515 14.224,56.64 MC1.37 ; 14.351,53.34 MC1.40 ; 14.986,52.324 14.986,52.24 MC1.41 ; C1.2 16.383,42.541 16.633,42.291 18.717,42.291 19.914,42.291 20.324,42.701 MC1.1 20.324,49.276 20.32,49.276 ; 19.914,58.928 20.324,58.518 ; R6.1@43.672,54.699 43.785,54.586 43.785,53.37 44.196,52.959 48.514,52.959 ; 48.514,15.24 48.514,43.18 48.514,52.959 ; 48.514,42.951 48.849,42.617 50.566,42.617 P2.29@50.655,42.527 ; R5.1 49.784,54.537 49.784,53.369 49.374,52.959 48.514,52.959
  Bottom Layer w0.3: v1(23.114,35.179) 23.147,35.212 23.147,38.743 D6.3
  Bottom Layer w0.4: D3.2@37.22,28.829 D3.2 38.246,28.829 38.373,28.956 v1(38.481,28.956)
  Bottom Layer w0.5: C29.2 11.049,4.889 ; C28.2 11.049,4.889 ; R12.1 26.226,1.905 ; R13.1 27.686,1.905 26.226,1.905 ; v1(28.067,12.446) 33.401,12.446 ; 31.369,48.514 31.369,41.314 31.662,41.021 v1(34.417,41.021) ; v1@32.639,48.503 32.639,42.164 38.823,42.164 39.116,41.871 v1(39.116,41.021) ; v1@32.639,48.657 v1@32.646,48.664 ; R24.1@33.401,14.224 33.401,12.446 ; 11.049,4.889 16.217,4.889 16.51,4.597 16.51,1.055 16.803,0.762 26.518,0.762 ; 26.226,1.905 26.226,1.055 26.518,0.762 ; 26.518,0.762 32.893,0.762 33.401,1.27 33.401,12.446
  Bottom Layer w0.7: 45.593,42.799 45.72,42.926 J5.1
  other v1: 29.394,48.619 30.594,48.619 31.794,48.619 32.994,48.619 29.394,49.819 30.594,49.819 31.794,49.819 32.994,49.819 29.394,51.019 30.594,51.019 31.794,51.019 32.994,51.019
GSM_PWR: P2.9 R10.1 | length 3.5
  Top Layer w0.5: P2.9 4.626,17.907 R10.1
MIC_N: C20.2 C21.2 C22.1 C23.1 D6.2 MC1.3 MK1.2 | length 18
  Top Layer w0.3: MK1.2 22.225,35.814 22.479,36.068 22.479,37.572 C21.2 C23.1 C22.1 C20.2 22.524,39.435 MC1.3
  Bottom Layer w0.3: MK1.2 22.228,34.166 22.228,36.573 D6.2
MIC_P: C18.2 C19.2 C20.1 C21.1 D6.1 MC1.4 MK1.1 | length 18.1
  Top Layer w0.3: MC1.4 23.624,39.555 C20.1 C18.2 C19.2 C21.1 23.809,35.958 24.13,35.637 MK1.1
  Bottom Layer w0.3: MK1.1 D6.1
NetC1_1: C1.1 MC1.44 | length 4.8
  Top Layer w0.5: C1.1 16.383,48.59 16.695,48.902 18.036,48.902 MC1.44
NetC8_1: C8.1 U1.6 | length 2.9
  Top Layer w0.4: U1.6 13.768,22.032 13.843,22.107 13.843,22.88 14.077,23.114 14.371,23.114 14.605,23.348 14.605,24.316 C8.1
NetC8_2: C8.2 L1.1 U1.2
NetC10_1: C10.1 R19.1 R20.2 U1.4 | length 8.2
  Top Layer w0.4: U1.4 15.585,20.132 15.841,20.388 R20.2@17.78,20.388 ; R19.1 17.78,18.596 R20.2@17.78,20.388 ; R20.2 R20.2@17.78,20.388 ; C10.1 R20.2@17.78,20.388
NetC10_2: C10.2 R18.2 R20.1 | length 3.9
  Top Layer w0.4: R18.2 17.907,22.674 R20.1 17.839,22.488 C10.2
NetC27_1: C27.1 U2.8 | length 6.3
  Top Layer w0.4: C27.1 29.103,20.955 29.337,20.721 29.337,18.681 29.198,18.542 U2.8
NetD1_2: D1.2 R1.2 | length 2.3
  Top Layer w0.5: R1.2 D1.2
NetD2_2: D2.2 R2.2 | length 2.3
  Top Layer w0.5: R2.2 D2.2
NetD4_2: D4.2 R16.2 | length 2.3
  Top Layer w0.5: R16.2 D4.2
NetD5_2: D5.2 R17.2 | length 2.3
  Top Layer w0.5: R17.2 D5.2
NetD7_1: D7.1 R26.1 | length 2.2
  Top Layer w0.5: D7.1 R26.1
NetD8_1: D8.1 R25.1 | length 2.2
  Top Layer w0.5: D8.1 R25.1
NetF1_1: F1.1 J4.A4B9 J4.B4A9
NetJ1_1: J1.1 MC1.35 | length 3.8
  Top Layer w0.5: J1.1 20.322,65.022 MC1.35@20.322,61.242
NetJ2_1: J2.1 MC1.26 | length 3.8
  Top Layer w0.5: MC1.26 30.225,61.241 J2.1 J2.1
NetJ4_A5: J4.A5 R12.2 | length 9.1
  Top Layer w0.2: v1@24.257,9.871 v1(24.257,10.033) 25.184,9.106 25.184,7.75 J4.A5
  Bottom Layer w0.2: v1(24.257,10.033) 24.765,9.525 R12.2
NetJ4_A6: J4.A6 J4.B6 U2.1 | length 17.6
  Top Layer w0.2: U2.1 26.67,18.542 27.186,18.026 27.186,7.744 27.178,7.736 27.178,6.34 27.061,6.223 26.303,6.223 26.186,6.34 J4.A6@26.186,7.744
NetJ4_A7: J4.A7 J4.B7 U2.2 | length 14.8
  Top Layer w0.2: U2.2 26.442,17.272 26.686,17.028 26.686,9.525 ; J4.B7@25.686,7.744 25.686,9.408 25.803,9.525 26.686,9.525 ; J4.A7@26.686,7.744 26.686,9.525
NetJ4_B5: J4.B5 R13.2 | length 8.3
  Top Layer w0.2: J4.B5 v1@28.195,9.905
  Bottom Layer w0.2: R13.2 27.686,9.616 28.067,9.997 v1(28.067,10.033)
NETLIGHT: MC1.16 R3.1 | length 21.4
  Top Layer w0.3: MC1.16 38.188,51.14 v1(38.192,51.136) ; v1(45.556,60.872) 45.556,59.16 R3.1
  Bottom Layer w0.3: v1(38.192,51.136) 45.365,51.136 45.593,51.364 45.593,60.794 45.619,60.82 45.608,60.82 v1(45.556,60.872)
NetMC1_9: MC1.9 P1.2 TP2.1 | length 38.8
  Top Layer w0.4: v1(28.829,42.164) 28.829,42.272 29.124,42.567 MC1.9
  Top Layer w0.5: TP2.1 1.429,50.387 5.429,50.387 P1.2
  Bottom Layer w0.4: P1.2 11.704,50.419 11.938,50.185 11.938,42.398 12.172,42.164 v1(28.829,42.164)
NetP2_15: P2.15 R8.1 | length 10.2
  Top Layer w0.4: R8.1@42.545,7.928 42.545,6.096 43.18,5.461 P2.15
NetP2_16: P2.16 R7.1 | length 8.9
  Top Layer w0.4: R7.1 44.456,6.584 44.69,6.35 48.28,6.35 48.514,6.584 48.514,7.62 48.685,7.791 50.463,7.791 P2.16
NetP2_21: P2.21 R26.2 | length 28.5
  Top Layer w0.5: v1@26.924,24.13 26.924,24.211 27.046,24.333 R26.2
  Bottom Layer w0.5: v1(27.051,24.13) 27.051,20.867 27.344,20.574 50.546,20.574 P2.21
NetP2_22: P2.22 R25.2 | length 31.7
  Top Layer w0.5: R25.2 27.048,27.815 27.048,29.715 v1(27.051,29.718)
  Bottom Layer w0.5: v1(27.051,29.718) 29.044,29.718 29.337,29.425 29.337,23.534 29.63,23.241 P2.22
NetQ1_1: Q1.1 R3.2 R5.2 | length 4.3
  Top Layer w0.5: R3.2 45.737,56.879 47.674,56.879 47.724,56.829 47.724,54.643 R5.2
NetQ1_3: Q1.3 R1.1 | length 1.8
  Top Layer w0.5: Q1.3 R1.1
NetQ2_1: Q2.1 R4.2 R6.2 | length 4.3
  Top Layer w0.5: R4.2 41.672,56.896 41.722,56.846 Q2.1 41.691,56.705 41.691,54.64 R6.2
NetQ2_3: Q2.3 R2.1 | length 1.9
  Top Layer w0.5: Q2.3 R2.1
NetQ3_1: Q3.1 R10.2 R11.2 | length 4
  Top Layer w0.4: R10.2 R11.2 9.652,16.891 Q3.1
NetR21_2: R21.2 U2.6 | length 4.4
  Top Layer w0.4: U2.6 29.15,15.945 31.553,15.945 v1(31.623,15.875)
  Bottom Layer w0.4: v1(31.623,15.875) 33.274,15.875 R21.2
NetR23_2: R23.2 U2.7 | length 4.5
  Top Layer w0.4: U2.7 v1(31.623,17.272)
  Bottom Layer w0.4: v1(31.623,17.272) 31.698,17.272 32.206,17.78 R23.2
PWRKEY: JP3.2 MC1.7 Q3.3 S1.2 | length 51.1
  Top Layer w0.4: S1.2 13.657,11.935 13.657,13.589 ; Q3.3 13.657,13.589 ; MC1.7 26.924,41.783 27.432,41.275 28.087,41.275 28.321,41.041 28.321,23.094 28.087,22.86 21.57,22.86 21.336,22.626 21.336,16.812 20.526,16.002 JP3.2 18.018,13.823 17.784,13.589 13.657,13.589
RFTXMON: MC1.25 R4.1 | length 16.5
  Top Layer w0.5: MC1.25 31.324,63.963 31.75,64.389 39.458,64.389 39.751,64.096 R4.1
RXD: J5.3 JP4.2 MC1.18 | length 52.3
  Top Layer w0.4: MC1.18 39.243,53.34 40.259,52.324 40.259,51.435 45.72,51.435 ; J5.3 45.72,51.435 ; JP4.2 47.53,15.494 47.764,15.728 47.764,51.201 47.53,51.435 45.72,51.435
SIM_CLK: C6.1 D3.4 J3.3 MC1.13 | length 47.9
  Top Layer w0.4: v1(32.639,24.511) J3.3 32.639,21.636 32.873,21.402 36.342,21.402 36.576,21.636 36.576,35.687 36.957,36.068 38.882,36.068 39.116,36.302 C6.1 40.787,37.279 41.021,37.513 41.021,42.672 40.513,43.18 33.758,43.18 33.524,43.414 MC1.13
  Bottom Layer w0.4: v1(32.639,24.511) 32.639,27.945 32.873,28.179 D3.4@35.17,28.179
SIM_DATA: C5.1 D3.5 J3.4 MC1.11 R15.1 | length 23.6
  Top Layer w0.3: C5.1 31.428,37.279 31.496,37.211 ; 31.324,39.483 31.496,39.311 31.496,37.211 ; v1(32.512,29.464) 32.512,34.475 J3.4 32.639,35.602 32.36,35.882 31.775,35.882 31.496,36.161 31.496,37.211
  Top Layer w0.4: 31.324,39.483 MC1.11
  Bottom Layer w0.3: v1(32.512,29.464) 32.52,29.472 35.175,29.472 35.233,29.529 R15.1
SIM_RST: C7.1 D3.1 J3.2 MC1.12 | length 34.8
  Top Layer w0.4: MC1.12 32.424,42.398 32.658,42.164 36.024,42.164 36.258,41.93 36.258,37.513 36.024,37.279 C7.1 34.163,37.088 34.163,26.289 35.179,25.273 v1(35.179,24.511) J3.2
  Bottom Layer w0.3: v1(35.179,24.511) 35.179,25.273 36.068,26.162 36.068,29.21 36.337,29.479 D3.1@37.22,29.479
  Bottom Layer w0.4: D3.1@37.22,29.479 D3.1@37.24,29.479
SIM_VDD: C2.1 C3.1 C4.1 D3.3 J3.1 MC1.14 R15.2 | length 55.8
  Top Layer w0.7: MC1.14 37.563,48.94 37.973,48.53 37.973,45.114 38.383,44.704 41.148,44.704 43.307,42.545 43.307,31.877 44.958,30.226 44.958,27.809 45.208,27.559 C2.1 45.14,27.559 44.89,27.309 C3.1 C4.1 44.89,21.63 44.656,21.395 37.953,21.395 37.719,21.63 J3.1 v1(37.719,24.511)
  Bottom Layer w0.3: D3.3@37.211,28.179 39.321,28.179 39.497,28.355 39.497,31.32 39.321,31.496 R15.2
  Bottom Layer w0.4: D3.3@37.211,28.179 37.211,26.543 37.719,26.035 v1(37.719,24.511)
SW1: C28.1 P2.13 R14.1 S2.1 | length 13.2
  Top Layer w0.5: P2.13 5.136,7.747 5.708,7.175 S2.1 6.42,7.316 6.42,9.341 v1(6.477,9.398)
  Bottom Layer w0.5: v1(6.477,9.398) 9.55,9.398 9.842,9.105 9.842,8.194 ; R14.1 8.643,8.194 9.842,8.194 ; C28.1 11.042,8.194 9.842,8.194
SW2: C29.1 P2.14 R22.1 S3.1 | length 18
  Top Layer w0.5: P2.14 5.715,5.207 6.279,4.643 S3.1
  Bottom Layer w0.5: P2.14 2.451,5.207 2.913,4.745 2.913,1.825 3.341,1.397 8.455,1.397 R22.1 8.643,1.585 11.042,1.585 C29.1
TXD: J5.2 JP5.2 MC1.17 | length 57.2
  Top Layer w0.4: MC1.17 38.839,52.24 39.497,51.582 39.497,50.018 39.731,49.784 43.041,49.784 43.275,49.55 43.275,47.498 ; JP5.2 39.731,15.494 39.497,15.728 39.497,19.685 40.005,20.193 46.629,20.193 46.863,20.427 46.863,35.56 44.323,38.1 44.323,42.926 43.275,43.974 43.275,47.498 ; J5.2 43.275,47.498
uRX: JP5.1 R8.2 | length 2.8
  Top Layer w0.4: R8.2@42.418,10.155 JP5.1
uTX: JP4.1 R7.2 R9.2 | length 6.5
  Top Layer w0.4: R7.2 45.847,9.96 JP4.1 ; R7.2@44.704,10.16 45.847,10.16 46.167,10.16 R9.2
  Bottom Layer w0.4: JP4.1 JP4.1@46.101,12.7
Vin: C9.1 C14.1 D4.1 P2.8 U1.3 U1.5 | length 50.2
  Top Layer w0.2: U1.3 12.334,20.132 13.115,20.913 13.577,20.913 U1.5
  Top Layer w0.4: v1(0.762,67.31) 1.939,67.31 D4.1
  Bottom Layer w0.4: v1(0.762,67.31) 0.762,67.202 0.513,66.953 0.513,23.597 0.869,23.241 P2.8
Vusb: C25.1 C26.1 F1.2 U2.5
pads on no net: J3.6 J4. J4.A8 J4.B8 MC1.2 MC1.5 MC1.6 MC1.19 MC1.20 MC1.21 MC1.22 MC1.23 MC1.28 MC1.29 MC1.30 MC1.31 MC1.32 MC1.33 MC1.38 MC1.39 P2.1 P2.2 P2.3 P2.5 P2.10 P2.11 P2.12 P2.17 P2.18 P2.19 P2.20 P2.23 P2.24 P2.25 P2.26 P2.27 P2.28 P2.30 P2.31 P2.32 U2.4

## Keep-outs
Keep-Out Layer:
  the board outline again, w0.2

## Other copper
Top Layer:
  region net NetC8_2: 13.208,26.289 14.605,26.289 14.605,28.321 12.192,28.321 12.192,28.366 8.636,28.366 8.636,26.416 11.43,26.416 cw(c11.43,26.162) 11.684,26.162 11.684,23.622 cw(c11.684,23.368) 11.938,23.368 11.938,21.59 cw(c11.684,21.59) 11.684,21.336 10.668,21.336 10.668,20.828 12.319,20.828 ccw(c12.319,21.521) 13.012,21.521 13.012,23.622 13.012,26.093 cw(c13.208,26.093)
  region net NetF1_1: 22.987,4.064 28.956,4.064 28.956,4.066 35.814,4.066 35.814,5.209 30.351,5.209 cw(c30.351,5.588) 29.972,5.588 29.972,6.35 ccw(c29.718,6.35) 29.718,6.604 29.464,6.604 cw(c29.464,6.949) 29.119,6.949 29.119,8.509 28.585,8.509 28.585,6.868 cw(c28.321,6.868) 28.321,6.604 28.194,6.604 ccw(c28.194,6.35) 27.94,6.35 27.94,5.842 cw(c27.686,5.842) 27.686,5.588 25.019,5.588 cw(c25.019,5.842) 24.765,5.842 24.765,6.35 ccw(c24.511,6.35) 24.511,6.604 cw(c24.511,6.842) 24.273,6.842 24.273,8.509 23.749,8.509 23.749,6.858 cw(c23.495,6.858) 23.495,6.604 22.987,6.604 ccw(c22.987,6.35) 22.733,6.35 22.733,4.318 ccw(c22.987,4.318)
  region net GND: 22.255,1.905 32.385,1.905 32.385,3.683 22.86,3.683 cw(c22.86,4.191) 22.352,4.191 22.352,6.35 cw(c22.86,6.35) 22.86,6.858 23.241,6.858 ccw(c23.241,7.112) 23.495,7.112 23.495,8.255 ccw(c23.114,8.255) 23.114,8.636 21.336,8.636 ccw(c21.336,7.62) 20.32,7.62 20.32,2.286 ccw(c20.828,2.286) 20.469,1.927 20.469,1.905 20.492,1.905 ccw(c20.828,2.286) 20.828,1.778 21.971,1.778 ccw(c21.971,2.159)
  region net Vusb: 31.877,9.779 33.528,9.779 cw(c33.528,9.271) 34.036,9.271 34.036,7.747 35.814,7.747 35.814,10.541 ccw(c35.306,10.541) 35.306,11.049 33.655,11.049 cw(c33.655,11.43) 33.274,11.43 33.274,12.827 ccw(c32.893,12.827) 32.893,13.208 32.639,13.208 cw(c32.639,13.462) 32.385,13.462 32.385,14.605 ccw(c32.004,14.605) 32.004,14.986 28.829,14.986 28.626,14.478 30.988,14.478 cw(c30.988,14.097) 31.369,14.097 31.369,12.954 31.877,12.954
  region net GND: 29.718,8.636 32.004,8.636 cw(c32.004,8.001) 32.639,8.001 32.639,5.588 30.607,5.588 cw(c30.607,5.842) 30.353,5.842 30.353,6.477 ccw(c29.972,6.477) 29.972,6.858 29.718,6.858 cw(c29.718,7.112) 29.464,7.112 29.464,8.382 cw(c29.718,8.382)
  region net GND: 1.016,24.511 4.191,24.511 cw(c4.191,24.13) 4.572,24.13 4.572,22.733 ccw(c5.08,22.733) 5.08,22.225 9.906,22.225 cw(c9.906,21.971) 10.16,21.971 ccw(c10.414,21.971) 10.414,21.717 11.684,21.717 11.684,22.86 ccw(c11.43,22.86) 11.43,23.114 11.049,23.114 cw(c11.049,23.495) 10.668,23.495 10.668,24.765 ccw(c10.287,24.765) 10.287,25.146 8.509,25.146 cw(c8.509,26.035) 7.62,26.035 7.62,35.814 cw(c7.874,35.814) 7.874,36.068 9.144,36.068 9.144,38.608 cw(c9.652,38.608) 9.652,39.116 10.668,39.116 ccw(c10.668,40.132) 11.684,40.132 11.684,51.435 cw(c12.138,51.435) 12.138,51.889 15.748,51.889 15.748,57.785 cw(c16.383,57.785) 16.383,58.42 19.304,58.42 cw(c19.304,57.785) 19.939,57.785 19.939,47.498 33.782,47.498 33.782,58.674 ccw(c33.02,58.674) 33.02,59.436 20.066,59.436 cw(c20.066,59.944) 19.558,59.944 19.558,60.579 ccw(c18.796,60.579) 18.796,61.341 12.065,61.341 ccw(c12.065,60.706) 11.43,60.706 11.43,58.674 11.43,53.975 cw(c10.541,53.975) 10.541,53.086 9.271,53.086 ccw(c9.271,52.07) 8.255,52.07 8.255,41.529 cw(c7.239,41.529) 7.239,40.513 5.461,40.513 ccw(c5.461,39.624) 4.572,39.624 4.572,30.099 cw(c3.937,30.099) 3.937,29.464 0.635,29.464 ccw(c0.635,29.041) 0.212,29.041 0.212,24.511
  region net Vin: 4.953,20.193 4.953,19.939 ccw(c5.461,19.939) 5.461,19.431 11.684,19.431 ccw(c11.684,19.685) 11.938,19.685 11.938,20.193 ccw(c11.557,20.193) 11.557,20.574 10.16,20.574 cw(c10.16,20.828) 9.906,20.828 9.906,21.717 4.826,21.717 cw(c4.826,22.352) 4.191,22.352 4.191,23.622 ccw(c3.683,23.622) 3.683,24.13 1.397,24.13 ccw(c1.397,23.622) 0.889,23.622 0.889,21.336 ccw(c1.651,21.336) 1.651,20.574 4.572,20.574 cw(c4.572,20.193)
  region net +4: 14.605,51.494 14.605,32.766 8.509,32.766 8.509,34.798 11.176,34.798 ccw(c11.176,35.179) 11.557,35.179 11.557,38.481 cw(c11.938,38.481) 11.938,38.862 ccw(c11.938,39.116) 12.192,39.116 12.192,43.434 12.827,43.434 ccw(c12.827,43.688) 13.081,43.688 13.081,51.494
  region net GND: 29.478,8.382 30.353,8.382 30.353,13.208 29.464,13.208 29.464,8.128
Bottom Layer:
  region net GND: 41.91,41.275 51.689,41.275 ccw(c51.689,42.037) 52.451,42.037 52.451,43.18 ccw(c51.816,43.18) 51.816,43.815 43.434,43.815 cw(c43.434,44.577) 42.672,44.577 42.672,48.133 ccw(c41.28,48.133) 41.28,49.525 37.724,49.525 cw(c37.724,50.292) 36.957,50.292 36.957,50.8 ccw(c35.814,50.8) 35.814,51.943 29.083,51.943 ccw(c29.083,51.435) 28.575,51.435 28.575,48.387 ccw(c29.464,48.387) 29.464,47.498 33.401,47.498 cw(c33.401,46.228) 34.671,46.228 34.671,43.561 ccw(c35.433,43.561) 35.433,42.799 40.386,42.799 cw(c40.386,42.164) 41.021,42.164 ccw(c41.91,42.164)

## Silkscreen, mask and mechanical layers (free items; w line width, h text height)
Top Overlay:
  lines w0.3: 18.796,28.702 19.05,28.702 ; 19.05,30.734 19.05,25.527 19.558,25.527 ; 33.274,15.875 33.274,19.558 34.671,20.955 37.211,20.955 37.211,16.002 37.084,15.875 33.274,15.875
  text "GSM" at 22.806,65.5 h2
  text "TSI" at 43.761,65.5 h2
  text "NSI" at 49.73,65.5 h2
  text "VIN" at 3.123,65.478 h2
  text "+4V" at 9.344,65.478 h2
  text "BT" at 32.712,65.478 h2
  text "2V8" at 0.857,56.952 h2 r270
  text "mRX" at 39.826,49.476 h2
  text "mTX" at 39.826,46.745 h2
  text "GND" at 0.857,46.663 h2 r270
  text "GND" at 39.824,44.037 h2
  text "LD1" at 15.24,29.972 h2
  text "LD2" at 15.44,28.14 h2
  text "CH340" at 39.329,19.358 h1.7 r270
  text "UC" at 39.132,14.024 h2 r270
  text "POWER" at 14.932,11.017 h2
  text "SW1" at 14.932,6.572 h2
  text "SW2" at 14.932,2.127 h2
Bottom Overlay:
  text "4V_EN" at 6.048,21.644 h2 r90
  text "Quectel M66 / eBoard V1.2" at 48.715,3.134 h2.5
  text "github.com/aKaReZa75" at 48.515,1.678 h2

## Text inside footprints (layer, text, board x,y; h text height)
J3: Mechanical 5 "↑" at 34.646,17.36 h4
J4: Mechanical 13 "PCB EDGE" at 32.436,-0.506 h0.8 r180
P1: Top Overlay "CW" at 4.242,53.035 h1 r90